# Altium PCB DAPLink-STM32F103CBT6.PcbDoc
Units mm, origin at the board's own origin, x right, y up, seen from the top; angles counter-clockwise.
Board outline 45.15 x 20.15 mm, 2 copper layers (Top Layer, Bottom Layer), stack 1.636 mm thick; 37 components, 31 nets, 151 pads, 31 vias.
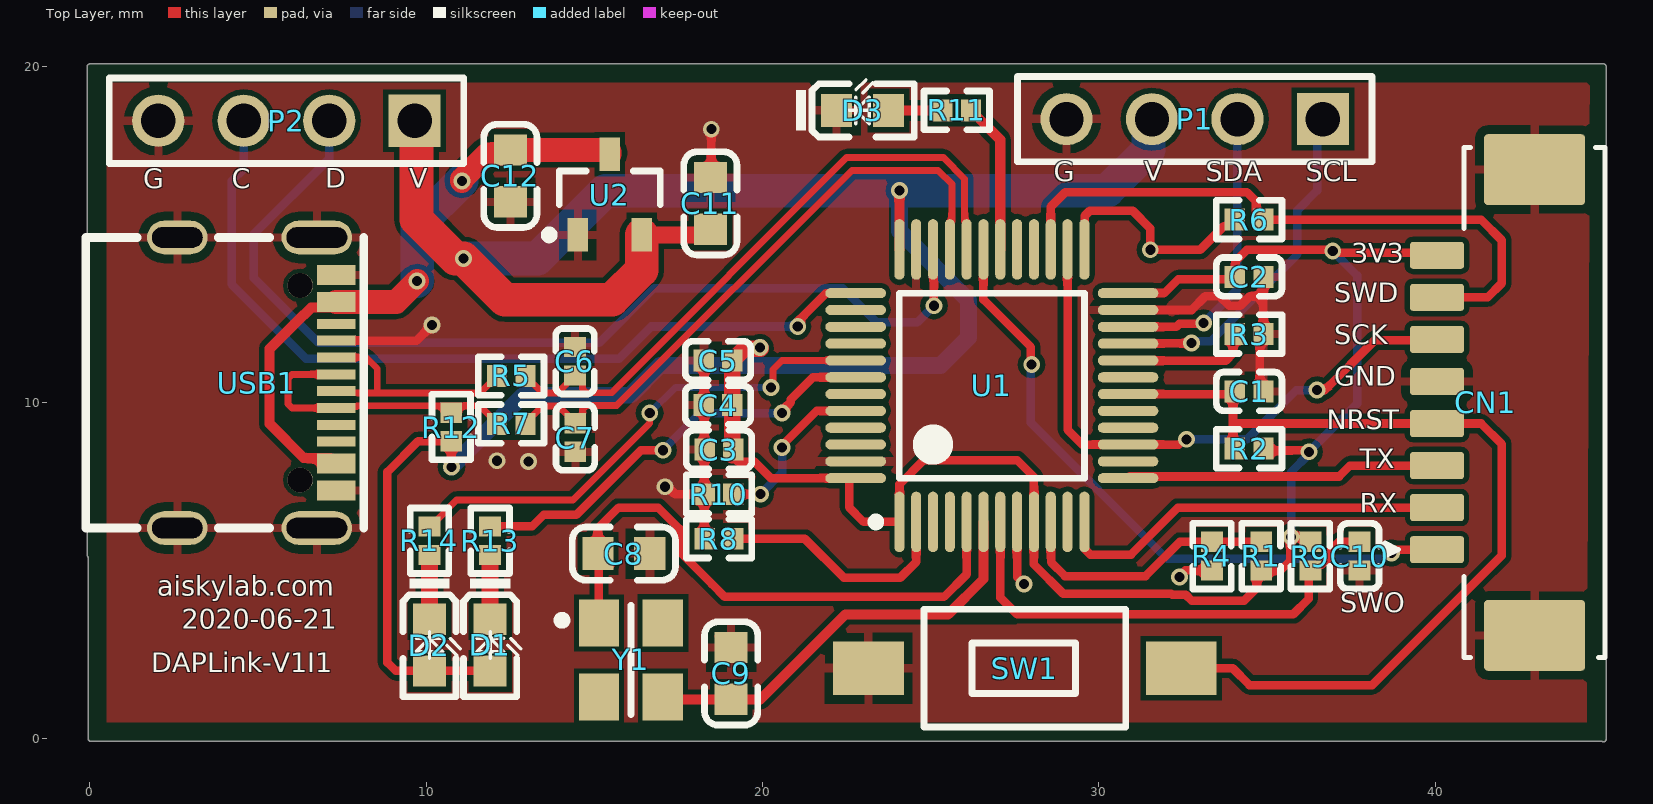
[diagram p0: Top Layer view]
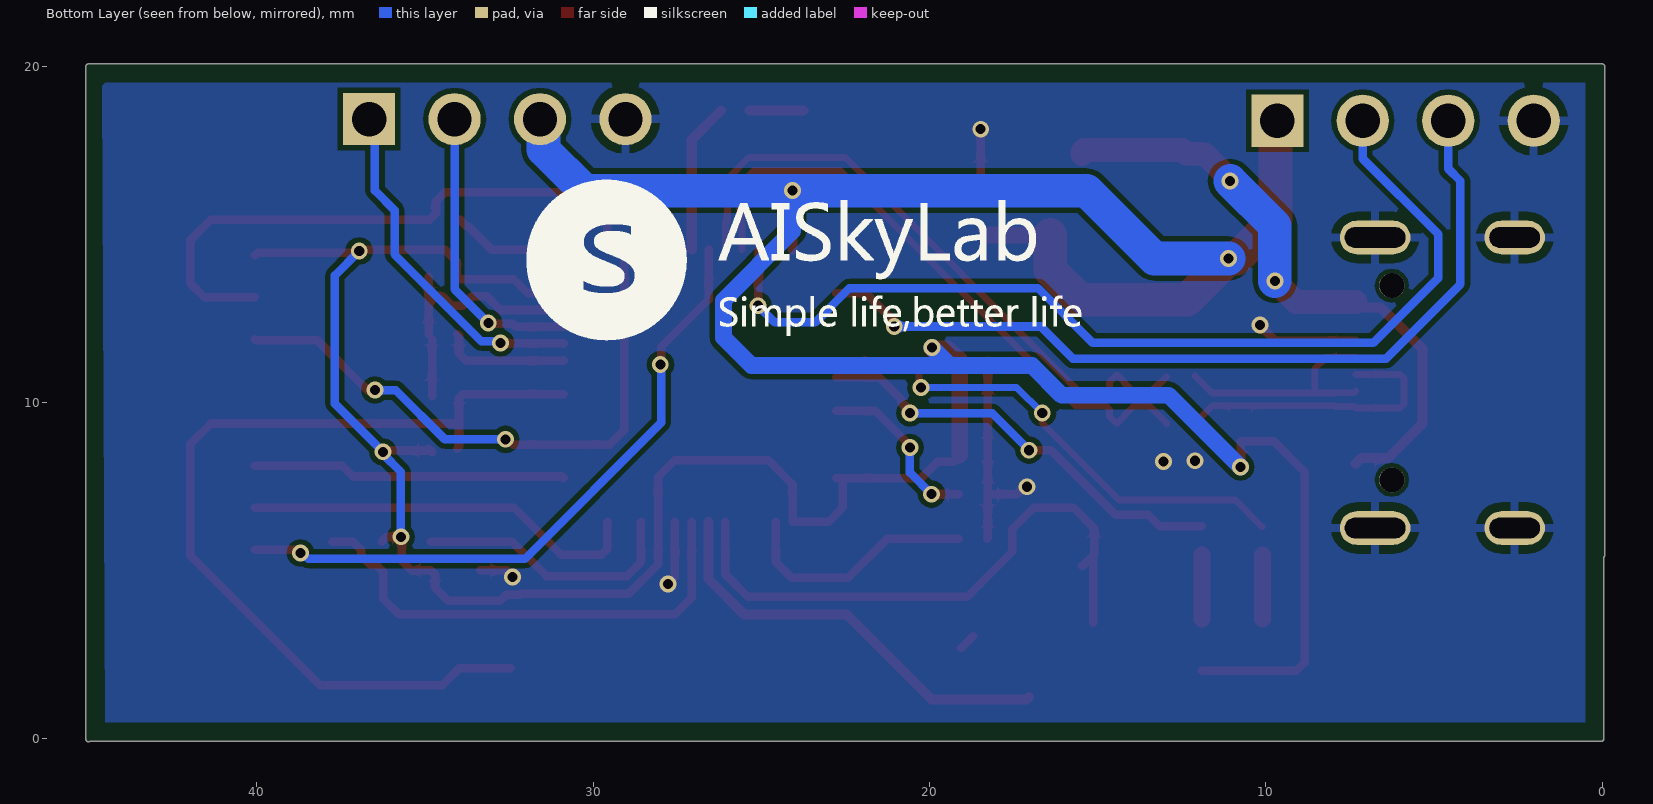
[diagram p1: Bottom Layer view, seen from below]

## Layer stack, top to bottom
Top Solder: solder mask 0.0127, Solder Resist, Dk 3.3
Top Layer: signal copper 0.0178
Dielectric1: core 1.6, FR-4, Dk 4.3
Bottom Layer: signal copper 0.0178
Bottom Solder: solder mask 0.0127, Solder Resist, Dk 3.3

## Board outline
-0.049,5.398 cw(c0,5.458) -0.077,5.458 -0.077,19.99 cw(c0,19.99) 0,20.066 45,20.066 cw(c45,19.99) 45.077,19.99 cw(c45,19.99) 45.077,19.99 cw(c45,19.989) 45.077,19.989 45.077,-0.011 cw(c45,-0.011) 44.961,-0.077 0.028,-0.077 cw(c0.028,0) -0.049,0

## Design rules (kind name [scope] priority, off if disabled: settings)
Clearance Clearance_2 [InComponent('USB1')] p1: gap=0.12 ignorepadtopadclearanceinfootprint=FALSE
Clearance Clearance_1 [InComponent('SW1')] p2: gap=0.152 ignorepadtopadclearanceinfootprint=FALSE except(0: Arc-SMDPad; 0.025: Arc-Arc)
Clearance [All] p3: gap=0.152 ignorepadtopadclearanceinfootprint=FALSE except(0.025: Arc-Arc)
DiffPairsRouting [All] p1: maxlimit=0.254 minlimit=0.178 mostfreqgap=0.178 toplayer_minwidth=0.203 toplayer_maxwidth=0.203 toplayer_prefwidth=0.203 bottomlayer_minwidth=0.203 bottomlayer_maxwidth=0.203 bottomlayer_prefwidth=0.203 maxuncoupledlength=12.7
HoleSize [All] p1: absolutevalues=TRUE maxlimit=7.62 minlimit=0.254 maxpercent=80.000 minpercent=20.000
HoleToHoleClearance [All] p1: gap=0 allowstackedmicrovias=TRUE
MinimumAnnularRing [All] p1: minimumring=0.1
MinimumSolderMaskSliver [All] p1 off: minsoldermaskwidth=0.254
PasteMaskExpansion [All] p1: expansion=0.254
PlaneClearance [All] p1: clearance=0.381
PlaneConnect [All] p1: pad.planeconnectstyle=Relief pad.reliefexpansion=0.508 pad.reliefentries=4 pad.reliefconductorwidth=0.254 pad.reliefairgap=0.254 via.planeconnectstyle=Direct via.reliefexpansion=0.508 via.reliefentries=4 via.reliefconductorwidth=0.254 via.reliefairgap=0.254
PolygonConnect [All] p1: thpad.connectstyle=Relief thpad.reliefconductorwidth=0.254 thpad.reliefentries=4 thpad.polygonreliefangle="90 Angle" thpad.airgapwidth=0.254 smdpad.connectstyle=Relief smdpad.reliefconductorwidth=0.254 smdpad.reliefentries=4 smdpad.polygonreliefangle="90 Angle" smdpad.airgapwidth=0.254 via.connectstyle=Direct via.reliefconductorwidth=0.254 via.reliefentries=4 via.polygonreliefangle="90 Angle" via.airgapwidth=0.254
RoutingVias [All] p1: holewidth=0.3 width=0.5 viastyle="Through Hole" minholewidth=0.3 minwidth=0.45 maxholewidth=0.3 maxwidth=1
SilkToSilkClearance [All] p1 off: silktosilkclearance=0.254
SilkToSolderMaskClearance SilkscreenOverComponentPads [IsPad] p1 off: minsilkscreentomaskgap=0.254 clearancetoexposedcopper=TRUE
SolderMaskExpansion [All] p1: expansion=0.254 istentingtop=FALSE
Width [All] p1: maxlimit=2.54 minlimit=0.1 preferedwidth=0.254
21 further rules are at their usual default settings.

## Classes and differential pairs
differential pair class USB2Diff: TGT_USB_D USB2D
differential pair USB2D: +USB2D_P -USB2D_N
differential pair TGT_USB_D: +TGT_USB_D_P -TGT_USB_D_N

## Components (designator, comment, footprint, x,y, rotation, side; value= is the part's Value field where it differs from the comment)
C1 "100nF (104) 10% 16V" 0402_C 34.463,10.33 r180 top
C2 "100nF (104) 10% 16V" 0402_C 34.463,13.736 r180 top
C3 "100nF (104) 10% 16V" 0402_C 18.702,8.597 r0 top
C4 "100nF (104) 10% 16V" 0402_C 18.675,9.921 r0 top
C5 "100nF (104) 10% 16V" 0402_C 18.675,11.245 r0 top
C6 "18pF (180) 5% 50V" 0402_C 14.422,11.227 r270 top
C7 "18pF (180) 5% 50V" 0402_C 14.432,8.959 r90 top
C8 "22pF" 0603_C 15.874,5.509 r180 top
C9 "22pF" 0603_C 19.065,1.944 r270 top
C10 "100nF (104) 10% 16V" 0402_C 37.749,5.433 r90 top
C11 "1uF (105) 10% 50V" 0603_C 18.448,15.92 r270 top
C12 "1uF (105) 10% 50V" 0603_C 12.501,16.737 r90 top
CN1 "gh1.25_8Pin" GH1.25_SMD_R_8Pin 41.5,10 r90 top
D1 "蓝灯 0603" 0603_LED_S1 11.899,2.788 r270 top
D2 "绿灯 0603" 0603_LED_S1 10.096,2.788 r270 top
D3 "红灯 0603" 0603_LED_S1 22.97,18.684 r0 top
P1 "61300411021" HDR-2.54-1x4-VB2B 36.656,18.424 r180 top
P2 "61300411021" HDR-2.54-1x4-VB2B 9.655,18.375 r180 top
R1 "4.7KΩ (4701) ±1%" 0402_R 34.822,5.433 r270 top
R2 "100KΩ (1003) ±1%" 0402_R 34.463,8.627 r0 top
R3 "10KΩ (1002) ±1%" 0402_R 34.463,12.033 r0 top
R4 "4.7KΩ (4701) ±1%" 0402_R 33.359,5.433 r90 top
R5 "33Ω (33R0) ±1%" 0402_R 12.524,10.789 r0 top
R6 "100Ω (1000) ±1%" 0402_R 34.463,15.438 r0 top
R7 "33Ω (33R0) ±1%" 0402_R 12.524,9.363 r0 top
R8 "10KΩ (1002) ±1%" 0402_R 18.702,5.95 r180 top
R9 "100KΩ (1003) ±1%" 0402_R 36.286,5.433 r90 top
R10 "100KΩ (1003) ±1%" 0402_R 18.702,7.274 r180 top
R11 "470Ω (4700) ±1%" 0402_R 25.77,18.684 r0 top
R12 "1.5KΩ (1501) ±1%" 0402_R 10.744,9.271 r90 top
R13 "470Ω (4700) ±1%" 0402_R 11.899,5.892 r270 top
R14 "470Ω (4700) ±1%" 0402_R 10.096,5.892 r270 top
SW1 "SW-PB" PB_TYCO_FSMSM 27.8,2.1 r180 top
U1 "STM32F103CBT6" STM32F103CBT6-FOOTPRINT-1 26.816,10.5 r90 top
U2 "XC6206P332MR" SOT95P245X110-3N 15.457,16.183 r90 top
USB1 "Type-C 16Pin" PCBComponent_1 4.2,10.6 r270 top
Y1 "8MHz" OSC_SI-TIME_SIT1602-2 16.085,2.349 r0 top

## Footprints (in the part's own frame and the unit in brackets; to place one, negate y for a bottom-side part, rotate by r counter-clockwise, add the part's x,y. Pads: shape width x height; smd on the part's side, far side on the other; paste and mask are expansions set on the pad)
0402_C [mm]
  rect 0.6x0.65 smd mask+0.051: 1(-0.425,0) 2(0.425,0)
  silkscreen extent -0.97,-0.58 0.97,0.58, body extent -0.48,-0.3 0.52,0.3, height 0.2
0402_R [mm]
  rect 0.6x0.65 smd mask+0.051: 1(-0.425,0) 2(0.425,0)
  silkscreen extent -0.97,-0.58 0.98,0.57, body extent -0.57,-0.27 0.58,0.28, height 0.41
0603_C [mm]
  rect 0.93x0.98 smd: 1(-0.77,0) 2(0.77,0)
  silkscreen extent -1.53,-0.79 1.54,0.79, body extent -0.8,-0.4 0.8,0.4, height 0.3
0603_LED_S1 [mm]
  rect 0.93x0.98 smd: A(0.77,0) K(-0.77,0)
  silkscreen extent -1.97,-0.79 1.54,0.92, body extent -0.8,-0.4 0.8,0.4, height 0.6
GH1.25_SMD_R_8Pin [mm]
  rrect20% 0.8x1.6 smd: 1(-4.375,1.45) 2(-3.125,1.45) 3(-1.875,1.45) 4(-0.625,1.45) 5(0.625,1.45) 6(1.875,1.45) 7(3.125,1.45) 8(4.375,1.45)
  rrect10% 2.1x3 smd: MP1(-6.925,-1.45) MP2(6.925,-1.45)
  silkscreen extent -7.58,-3.55 7.57,3, body extent -7.66,-3.6 7.66,1.74, height 3.53
HDR-2.54-1x4-VB2B [mm] ".025 SQ Post Terminal Strip Assembly, 1x4 Pins, Vertical, 2.54mm Pitch, Male"
  rect 1.55x1.55 hole 1.02: 1(0,0)
  round 1.55 hole 1.02: 2(2.54,0) 3(5.08,0) 4(7.62,0)
  silkscreen extent -1.46,-1.27 9.08,1.27, body extent -1.27,-1.27 8.89,1.27, height 8.38
OSC_SI-TIME_SIT1602-2 [mm] "SiT1602 Oscillators Series, Version 3.2mmx2.5mm, Pitch 2.1mm; 4 Pin"
  rect 1.2x1.4 smd: 1(-0.95,1.1) 2(-0.95,-1.1) 3(0.95,-1.1) 4(0.95,1.1)
  silkscreen extent -2.17,-1.62 0,1.63, body extent -1.55,-1.8 1.55,1.8, height 0.8
PB_TYCO_FSMSM [mm] "Body 3.5x6.0mm, Pushbutton Switch,  TYCO FSMSM Serie"
  rect 2.1x1.6 smd: 1(-4.65,0) 2(4.65,0)
  silkscreen extent -3,-1.75 3,1.75, body extent -5,-1.75 5,1.75, height 4.3
PCBComponent_1 [mm]
  oval 1x2.099 hole 0.61 slot 1.8 at 90 deg: 1(-4.307,2.55) 2(4.333,2.55)
  oval 1x1.799 hole 0.61 slot 1.5 at 90 deg: 3(-4.307,-1.6) 4(4.333,-1.6)
  rect 0.6x1.15 smd: A1B12(-3.187,3.125) A4B9(-2.387,3.125) B1A12(3.213,3.125) B4A9(2.413,3.125)
  rect 0.3x1.15 smd: A5(-1.237,3.125) A6(-0.237,3.125) A7(0.263,3.125) A8(-1.737,3.125) B5(1.763,3.125) B6(0.763,3.125) B7(-0.737,3.125) B8(1.263,3.125)
  round 0.75 hole 0.75 unplated: ""(-2.877,2.05) ""(2.903,2.05)
  silkscreen extent -4.3,-4.32 4.33,3.94, body extent -4.47,-4.28 4.47,3.3, height 3.26
SOT95P245X110-3N [mm] "SOT23, 3-Leads, Body 2.90x2.45mm, Pitch 0.95mm, IPC Medium Density"
  rect 1x0.6 smd: 1(-1.2,0.95) 2(-1.2,-0.95) 3(1.2,0)
  silkscreen extent -1.32,-1.5 0.7,1.92, body extent -1.3,-1.5 1.3,1.5, height 1.1
STM32F103CBT6-FOOTPRINT-1 [mm]
  oval 1.8x0.3 smd: 1(-4.05,2.75) 2(-4.05,2.25) 3(-4.05,1.75) 4(-4.05,1.25) 5(-4.05,0.75) 6(-4.05,0.25) 7(-4.05,-0.25) 8(-4.05,-0.75) 9(-4.05,-1.25) 10(-4.05,-1.75) 11(-4.05,-2.25) 12(-4.05,-2.75) 25(4.05,-2.75) 26(4.05,-2.25) 27(4.05,-1.75) 28(4.05,-1.25) 29(4.05,-0.75) 30(4.05,-0.25) 31(4.05,0.25) 32(4.05,0.75) 33(4.05,1.25) 34(4.05,1.75) 35(4.05,2.25) 36(4.05,2.75)
  oval 0.3x1.8 smd: 13(-2.75,-4.05) 14(-2.25,-4.05) 15(-1.75,-4.05) 16(-1.25,-4.05) 17(-0.75,-4.05) 18(-0.25,-4.05) 19(0.25,-4.05) 20(0.75,-4.05) 21(1.25,-4.05) 22(1.75,-4.05) 23(2.25,-4.05) 24(2.75,-4.05) 37(2.75,4.05) 38(2.25,4.05) 39(1.75,4.05) 40(1.25,4.05) 41(0.75,4.05) 42(0.25,4.05) 43(-0.25,4.05) 44(-0.75,4.05) 45(-1.25,4.05) 46(-1.75,4.05) 47(-2.25,4.05) 48(-2.75,4.05)
  silkscreen extent -4.17,-2.75 2.75,3.57, body extent -3.5,-3.5 3.5,3.5, height 1.6

## Part data
C1 C2 C3 C4 C5 C10: library part "0402 100nF (104) 10% 16V", "贴片电容", Package=0402, SuppliersPartNumber=C1525, ComponentLink1Description=供应商链接, ComponentLink1URL=http://www.szlcsc.com/product/details_1877.html, Supplier=LC
C6 C7: library part "0402 18pF (180) 5% 50V", "贴片电容", Package=0402, SuppliersPartNumber=C1549, ComponentLink1Description=供应商链接, ComponentLink1URL=http://www.szlcsc.com/product/details_1901.html, Supplier=LC
C8 C9: library part Cap, "Capacitor", LatestRevisionDate=17-Jul-2002, LatestRevisionNote="Re-released for DXP Platform.", PackageReference=RAD-0.3, Published=8-Jun-2000, Publisher="Altium Limited"
C11 C12: library part "0603 1uF (105) 10% 50V", "贴片电容", Package=0603, SuppliersPartNumber=C15849, ComponentLink1Description=供应商链接, ComponentLink1URL=http://www.szlcsc.com/product/details_16531.html, Supplier=LC
D1: library part "0603 蓝灯", "发光二极管", Package=0603, SuppliersPartNumber=C72041, ComponentLink1Description=供应商链接, ComponentLink1URL=http://www.szlcsc.com/product/details_73150.html, Supplier=LC
D2: library part "0603 绿灯", "发光二极管", Package=0603, SuppliersPartNumber=C72043, ComponentLink1Description=供应商链接, ComponentLink1URL=http://www.szlcsc.com/product/details_73152.html, Supplier=LC
D3: library part "0603 红灯", "发光二极管", Package=0603, SuppliersPartNumber=C2286, ComponentLink1Description=供应商链接, ComponentLink1URL=http://www.szlcsc.com/product/details_2659.html, Supplier=LC
P1 P2: library part HDR-1x4Pos, "THT Angled Pin Header WR-PHD, Pitch 2.54 mm, Single Row, 4 pins", Contact Resistance=20mOhm, Manufacturer="Wurth Elektronik", Operating Temperature=-40to105degC, Rated Current=3A, Withstanding Voltage=500VAC, Working Voltage=250VAC, Datasheet URL=https://katalog.we-online.de/em/datasheet/6130xx11021.pdf, Gender=Male, Manufacturer URL=http://www.we-online.de, Mounting Technology=THT, Orientation=Angled, Package Reference=61300411021, Packaging=Bag, Part Number=61300411021, Pin Number=4, Pitch=2.54mm, Publisher=WurthElektronik, Row Number=Single
R1 R4: library part "0402 4.7KΩ (4701) 1%", "贴片电阻", Package=0402, SuppliersPartNumber=C25900, ComponentLink1Description=供应商链接, ComponentLink1URL=http://www.szlcsc.com/product/details_26643.html, Supplier=LC
R2 R9 R10: library part "0402 100KΩ (1003) 1%", "贴片电阻", Package=0402, SuppliersPartNumber=C25741, ComponentLink1Description=供应商链接, ComponentLink1URL=http://www.szlcsc.com/product/details_26484.html, Supplier=LC
R3 R8: library part "0402 10KΩ (1002) 1%", "贴片电阻", Package=0402, SuppliersPartNumber=C25744, ComponentLink1Description=供应商链接, ComponentLink1URL=http://www.szlcsc.com/product/details_26487.html, Supplier=LC
R5 R7: library part "0402 33Ω (33R0) 1%", "贴片电阻", Package=0402, SuppliersPartNumber=C25105, ComponentLink1Description=供应商链接, ComponentLink1URL=http://www.szlcsc.com/product/details_25848.html, Supplier=LC
R6: library part "0402 100Ω (1000) 1%", "贴片电阻", Package=0402, SuppliersPartNumber=C25076, ComponentLink1Description=供应商链接, ComponentLink1URL=http://www.szlcsc.com/product/details_25819.html, Supplier=LC
R11 R13 R14: library part "0402 470Ω (4700) 1%", "贴片电阻", Package=0402, SuppliersPartNumber=C25117, ComponentLink1Description=供应商链接, ComponentLink1URL=http://www.szlcsc.com/product/details_25860.html, Supplier=LC
R12: library part "0402 1.5KΩ (1501) 1%", "贴片电阻", Package=0402, SuppliersPartNumber=C25867, ComponentLink1Description=供应商链接, ComponentLink1URL=http://www.szlcsc.com/product/details_26610.html, Supplier=LC
SW1: "Switch", LatestRevisionDate=17-Jul-2002, LatestRevisionNote="Re-released for DXP Platform.", PackageDescription="Switch; 2 Leads", PackageReference=SPST-2, Published=24-Mar-1999, Publisher="Altium Limited"
U1: library part CMP-020-00023-1, "ARM® 32-bit Cortex®-M3 CPU Core,72 MHz maximum frequency", Case/Package=LQFP48, Pins=48, RAM Size="64 or 128 Kbytes of Flash memory, 20 Kbytes of SRAM"
U2: library part CMP-019-00049-1, "低压差线性稳压(LDO),最大输入8V，输出电流100mA", Case/Package=SOT-23, Max Operating Temperature=80°C, Max Supply Voltage=8V, Min Operating Temperature=-25°C, Output Voltage=3.3V, Pins=3
USB1: library part TYPE-C16PIN, ComponentLink1Description=嘉立创, ComponentLink1URL=https://item.szlcsc.com/372551.html, Datasheet="javascript:fileModule.downloadFileNoRemark('https://atta.szlcsc.com/upload/public/pdf/source/20190521/C393939_7B9043D4CF1026AF443AB60D91FBCD5C.pdf%3FExpires%3D4070880000%26OSSAccessKeyId%3DLTAIJDIkh7KmGS1H%26Signature%3DcQcE%252FNX1dDNXtBUBosJ1RmuR16Q%253D%26response-content-disposition%3Dattachment%253Bfilename%253DC393939_TYPE-C%2525E6%2525AF%25258D%2525E5%2525BA%2525A716PIN%2525E5%2525BF%2525AB%2525E5%252585%252585%2525E9%252597%2525AA%2525E5%252585%252585USB3.0%2525E6%2525B2%252589%2525E6%25259D%2525BF%2525E6%2525AF%25258D%2525E5%2525BA%2525A7%2525E8%2525BF%25259E%2525E6%25258E%2525A5%2525E5%252599%2525A8_2019-05-21.PDF','60D38A6780882313296C67311B688FC3','new_pdf_doc_pdf','');buriedPoint({ty: 'click',op: 'download_pdf',data: 'C393939'});"
Y1: library part XTAL-4

## Via types
v1: diameter 0.5, hole 0.3, Top Layer to Bottom Layer, tented both sides, 31 vias

## Nets (pads, with @x,y where several pads share a name; then routed paths per layer and width w, separated by ;. In a path a pad name is that pad's centre, name@x,y a point inside that pad or via, vN(x,y) a via of type N, cw(c..) or ccw(c..) an arc to the next point about the centre after c; other vN are vias at no path point)
GND: C1.1 C2.1 C3.1 C4.1 C5.1 C6.1 C7.1 C8.1 C9.1 C10.1 C11.1 C12.1 CN1.5 CN1.MP1 CN1.MP2 D3.K P1.4 P2.4 R3.2 R4.1 R8.2 R10.2 SW1.2 U1.8 U1.23 U1.35 U1.47 U2.1 USB1.1 USB1.2 USB1.3 USB1.4 USB1.A1B12 USB1.A5 USB1.B1A12 | length 22.4
  Top Layer w0.254: USB1.A5 9.712,11.837 v1@10.124,12.25 ; v1@10.124,12.251 10.168,12.295 v1(10.168,12.3) ; v1(17.097,7.496) 17.176,7.496 17.398,7.274 R10.2@18.264,7.274 ; C5.1 18.264,11.231 R10.2@18.264,7.274 ; R8.2 18.264,5.964 R10.2@18.264,7.274 ; R10.2 R10.2@18.264,7.274 ; C11.1 18.475,16.717 v1(18.475,18.125) ; C9.1@18.702,3.052 19.04,2.714 C9.1 ; U1.8 27.566,4.813 v1(27.775,4.604) ; U1.23 32.751,12.75 33.162,13.161 33.593,13.161 33.877,12.877 34.199,12.877 34.483,13.161 34.888,13.161 ; v1(32.391,4.813) 32.391,4.838 32.561,5.008 R4.1 ; C1.1@34.782,10.19 R3.2@34.782,11.879 ; R3.2 34.888,13.161 ; C2.1 34.888,13.161
  other v1: 13.039,8.245 12.099,8.269
HSE_IN: C8.2 U1.5 Y1.1 | length 17.8
  Top Layer w0.254: Y1.1 C8.2@15.135,5.453 ; C8.2@15.467,5.146 15.442,5.146 C8.2@15.135,5.453 ; U1.5 26.066,4.895 25.392,4.22 18.876,4.22 18.493,4.604 17.53,5.566 17.53,6.24 16.895,6.875 15.72,6.875 15.104,6.26 C8.2 15.135,5.478 C8.2@15.135,5.453
HSE_OUT: C9.2 U1.6 Y1.3 | length 12.7
  Top Layer w0.3: Y1.3 17.11,1.174 19.935,1.174 22.463,3.703 25.517,3.703 26.566,4.752 U1.6
I2C2_SCL: P1.1 U1.21 | length 10.5
  Top Layer w0.254: U1.21 30.875,11.759 32.74,11.759 v1(32.751,11.771)
  Bottom Layer w0.254: v1(32.751,11.771) 32.799,11.818 33.316,11.818 33.861,12.363 35.9,14.402 35.9,15.716 36.484,16.3 36.484,18.252 P1.1
I2C2_SDA: P1.2 U1.22 | length 8.8
  Top Layer w0.254: U1.22 32.297,12.25 32.391,12.344 33.093,12.344 v1(33.113,12.363)
  Bottom Layer w0.254: v1(33.113,12.363) 34.116,13.366 P1.2
IF_SWCLK: P2.3 U1.37 | length 25.6
  Top Layer w0.254: v1(21.044,12.259) 21.044,12.409 21.876,13.241 22.758,13.241 U1.37
  Bottom Layer w0.254: P2.3@4.212,18.375 P2.3@4.212,18.574 ; P2.3 4.575,16.948 4.212,16.585 4.212,13.513 6.425,11.3 15.732,11.3 16.691,12.259 v1(21.044,12.259)
IF_SWDIO: P2.2 U1.34 | length 29.6
  Top Layer w0.254: U1.34 25.066,13.788 25.092,13.762 v1(25.092,12.877)
  Bottom Layer w0.254: P2.2 7.115,17.245 4.875,15.005 4.875,13.7 6.804,11.771 15.146,11.771 16.775,13.4 22.375,13.4 23.394,12.381 24.596,12.381 v1(25.092,12.877)
LED_COM_GRN: R14.1 U1.41 | length 15.2
  Top Layer w0.203: R14.1 10.121,6.317 10.904,7.1 14.362,7.1 16.644,9.382 v1(16.644,9.685) ; v1(20.248,10.448) 20.305,10.505 20.305,10.976 20.579,11.25 U1.41
  Bottom Layer w0.203: v1(16.644,9.685) 17.408,10.448 v1(20.248,10.448)
LED_DAP_BLUE: R13.1 U1.42 | length 12.8
  Top Layer w0.254: R13.1 13.145,6.317 13.488,6.659 14.46,6.659 16.381,8.581 v1(17.035,8.581) ; v1(20.579,9.685) 20.579,9.751 20.838,10.01 20.838,10.091 21.497,10.75 U1.42
  Bottom Layer w0.254: v1(17.035,8.581) 17.035,8.585 18.135,9.685 v1(20.579,9.685)
LED_PWR_RED: R11.2 U1.30 | length 4.5
  Top Layer w0.3: R11.2 27.066,17.812 U1.30
NetC10_2: C10.2 R9.1 U1.7 | length 14.6
  Top Layer w0.254: U1.7 27.066,4.203 27.566,3.703 35.775,3.703 36.232,4.159 36.232,4.954 R9.1 36.459,5.181 36.629,5.181 36.89,5.442 36.89,5.612 37.136,5.858 C10.2
NetD1_K: D1.K R13.2 | length 1.9
  Top Layer w0.5: D1.K R13.2
NetD2_K: D2.K R14.2 | length 1.9
  Top Layer w0.5: D2.K R14.2
NetD3_A: D3.A R11.1 | length 1.6
  Top Layer w0.3: D3.A R11.1
NetR1_1: R1.1 R4.2 U1.10 | length 8
  Top Layer w0.254: U1.10 28.575,6.441 28.575,5.252 28.989,4.837 31.387,4.837 32.408,5.858 R1.1
NetR3_1: R3.1 U1.20 | length 3.8
  Top Layer w0.254: U1.20 30.875,11.241 33.768,11.241 33.985,11.458 33.985,11.98 R3.1
NetR6_1: R6.1 U1.25 | length 6.7
  Top Layer w0.254: U1.25 29.575,14.559 29.575,15.551 29.724,15.7 31.002,15.7 31.526,15.176 v1(31.526,14.541) 33.009,14.541 33.709,15.24 33.759,15.24 33.932,15.413 R6.1@33.932,15.438
NetR8_1: R8.1 U1.2 | length 7.3
  Top Layer w0.254: R8.1 21.255,5.95 22.417,4.788 24.094,4.788 24.566,5.26 U1.2
NetR10_1: R10.1 U1.44 | length 5.1
  Top Layer w0.254: R10.1 v1(19.935,7.274) ; v1(20.579,8.659) 20.579,8.723 21.607,9.75 U1.44
  Bottom Layer w0.254: v1(19.935,7.274) 20.579,7.918 v1(20.579,8.659)
TGT_NRESET: C1.2 CN1.4 R2.1 SW1.1 U1.18 | length 27.4
  Top Layer w0.254: U1.18 33.872,10.25 33.985,10.137 33.985,9.543 33.985,8.68 R2.1 ; SW1.1 33.975,2.1 34.475,1.6 38.124,1.6 38.745,2.221 41.975,5.451 41.975,8.762 41.362,9.375 CN1.4 34.153,9.375
TGT_RX: CN1.2 U1.12 | length 11.9
  Top Layer w0.254: U1.12 29.575,6.441 29.575,5.641 29.738,5.478 30.953,5.478 32.35,6.875 CN1.2
TGT_SWCLK: CN1.6 U1.15 U1.26 | length 17.8
  Top Layer w0.254: U1.26 29.066,9.188 29.504,8.75 U1.15 32.377,8.75 32.532,8.906 v1(32.599,8.906) ; v1(36.484,10.368) 36.718,10.368 38.2,11.85 40.025,11.85 CN1.6
  Bottom Layer w0.254: v1(32.599,8.906) 34.406,8.906 35.868,10.368 v1(36.484,10.368)
TGT_SWDIO: CN1.7 R6.2 U1.27 | length 19
  Top Layer w0.254: U1.27 28.566,15.821 28.995,16.25 34.399,16.25 34.668,15.981 34.668,15.627 34.857,15.438 41.362,15.438 41.975,14.825 41.975,13.545 41.555,13.125 CN1.7
TGT_SWO: CN1.1 U1.31 | length 19.6
  Top Layer w0.254: U1.31 26.566,13.058 27.975,11.649 27.975,11.15 v1(28,11.125) ; v1(38.7,5.525) 38.767,5.525 38.867,5.625 CN1.1
  Bottom Layer w0.254: v1(28,11.125) 27.975,11.1 27.975,9.4 32.025,5.35 38.458,5.35 38.633,5.525 v1(38.7,5.525)
TGT_TX: CN1.3 U1.13 | length 9.3
  Top Layer w0.254: U1.13 30.916,7.8 37.136,7.8 37.461,8.125 CN1.3
TGT_USB_D_N: R5.1 USB1.A7 USB1.B7 | length 7.1
  Top Layer w0.203: USB1.A7 7.373,10.289 7.95,10.289 7.953,10.285 8.544,10.285 ; USB1.B7 8.212,11.337 8.544,11.005 8.544,10.285 ; R5.1 11.595,10.285 8.544,10.285
TGT_USB_D_P: R7.1 R12.2 USB1.A6 USB1.B6 | length 8.8
  Top Layer w0.203: USB1.A6 6.012,10.837 5.893,10.718 5.893,9.956 6.012,9.837 USB1.B6 7.373,9.885 7.935,9.885 7.953,9.904 11.583,9.904 12.099,9.388 R7.1
USB2D_N: C6.2 R5.2 U1.32 | length 19.1
  Top Layer w0.203: R5.2@12.949,10.764 13.148,10.566 13.173,10.566 13.457,10.282 13.902,10.282 14.199,10.579 14.199,10.604 14.397,10.802 14.447,10.802 14.646,10.604 14.646,10.407 14.765,10.288 15.504,10.288 22.495,17.279 25.377,17.279 26.007,16.649 26.007,15.386 26.066,15.326 U1.32
USB2D_P: C7.2 R7.2 U1.33 | length 18.5
  Top Layer w0.203: R7.2 12.949,9.388 13.463,9.901 13.915,9.901 14.208,9.607 14.208,9.582 14.407,9.384 14.447,9.384 14.646,9.582 14.646,9.788 14.765,9.907 15.662,9.907 22.653,16.898 25.219,16.898 25.626,16.492 25.626,15.386 25.566,15.326 U1.33
VBus: C12.2 U2.3 USB1.A4B9 USB1.B4A9 | length 18.4
  Top Layer w0.254: 6.34,12.593 6.354,12.593 ; USB1.A4B9@7.16,12.822 USB1.A4B9 ; C12.2@12.377,17.383 C12.2
  Top Layer w0.305: 6.34,12.593 5.343,11.596 5.343,9.363 6.354,8.351 7.16,8.351 USB1.B4A9 ; 6.354,12.593 6.584,12.822 USB1.A4B9@7.16,12.822
  Top Layer w0.7: USB1.A4B9 9.104,12.987 v1(9.729,13.612) ; v1(11.06,16.585) 11.06,16.636 11.807,17.383 11.951,17.383 11.96,17.392 C12.2@12.377,17.392 ; C12.2 15.407,17.507 15.457,17.457 U2.3
  Bottom Layer w1: v1(9.729,13.612) 9.729,15.254 v1(11.06,16.585)
VCC3V3: C2.2 C3.2 C4.2 C5.2 C11.2 CN1.8 D1.A D2.A P1.3 P2.1 R1.2 R2.2 R9.2 R12.1 U1.1 U1.9 U1.24 U1.36 U1.48 U2.2 | length 124.1
  Top Layer w0.254: v1(10.754,8.085) 10.744,8.095 R12.1 9.756,8.846 8.845,7.935 8.845,2.271 9.097,2.018 D1.A ; C11.2@18.281,14.983 C11.2 ; C3.2@19.1,8.435 19.1,8.41 19.273,8.237 19.762,8.237 20.248,7.75 U1.48@22.591,7.75 ; U1.48 U1.48@22.591,7.75 ; U1.24 30.875,13.259 31.95,13.259 32.35,13.659 33.932,13.659 34.052,13.78 34.052,14.194 34.399,14.541 36.909,14.541 v1(36.95,14.5) 36.997,14.453 39.972,14.453 CN1.8 ; R2.2@34.782,8.521 R2.2 ; 35.728,8.568 34.947,8.568 R2.2 ; v1(36.246,8.534) 36.199,8.581 34.934,8.581 R2.2 ; R9.2 36.136,6.007 v1(35.711,6.007) 35.681,5.978 35.681,5.292 35.397,5.008 R1.2 34.692,4.878 34.692,4.482 34.32,4.109 32.751,4.109 32.577,4.283 32.172,4.283 32.141,4.314 28.938,4.314 28.066,5.186 U1.9 28.066,7.788 27.566,8.288 24.793,8.288 24.066,7.562 U1.1 23.004,6.45 22.57,6.884 22.57,7.729 U1.48@22.591,7.75
  Top Layer w0.3: U1.36 v1(24.066,16.3)
  Top Layer w0.5: U2.2 C11.2@18.281,14.983 ; C3.2@19.1,8.435 19.1,11.27 19.15,11.32 19.175,11.32 19.451,11.596 19.935,11.596 19.935,11.617 v1(19.92,11.632)
  Top Layer w1: P2.1 9.712,18.318 9.712,15.438 10.869,14.281 v1(11.109,14.281) 12.333,13.058 15.527,13.058 16.407,13.937 U2.2
  Bottom Layer w0.254: v1(35.711,6.007) 35.711,7.936 36.25,8.475 36.25,8.53 v1(36.246,8.534) 37.675,9.964 37.675,13.775 v1(36.95,14.5)
  Bottom Layer w0.5: v1(10.754,8.085) 12.883,10.214 16.065,10.214 16.951,11.1 19.388,11.1 ; v1(19.92,11.632) 19.388,11.1 ; v1(24.066,16.3) 24.066,15.094 26.125,13.036 26.125,11.936 25.29,11.1 19.388,11.1
  Bottom Layer w1: v1(11.109,14.281) 13.306,14.281 15.325,16.3 v1(24.066,16.3) 30.256,16.3 31.471,17.515 31.471,18.319 P1.3
pads on no net: U1.3 U1.4 U1.11 U1.14 U1.16 U1.17 U1.19 U1.28 U1.29 U1.38 U1.39 U1.40 U1.43 U1.45 U1.46 USB1. USB1.A8 USB1.B5 USB1.B8 Y1.2 Y1.4

## Polygon pours and split planes (outlines as drawn)
GND on Bottom Layer "GND_L02_P000" (solid, remove dead copper, pour order 0): 0.5,0.5 44.5,0.5 44.587,19.5 0.5,19.5
GND on Top Layer "GND_L01_P001" (solid, remove dead copper, pour order 1): 0.5,0.5 44.5,0.5 44.587,19.5 0.5,19.5

## Other copper
Top Layer:
  pour cut-out: 25.517,3.394 27.543,3.394 27.566,3.418 26.86,4.124 26.86,4.738 25.517,3.394

## Silkscreen, mask and mechanical layers (free items; w line width, h text height)
Top Overlay:
  text "G" at 28.65,16.384 h1
  text "V" at 31.35,16.395 h1
  text "SDA" at 33.175,16.384 h1
  text "SCL" at 36.15,16.384 h1
  text "G" at 1.582,16.175 h1
  text "C" at 4.212,16.175 h1
  text "D" at 7,16.187 h1
  text "V" at 9.496,16.187 h1
  text "3V3" at 37.495,13.966 h1
  text "SWD" at 36.997,12.791 h1
  text "SCK" at 36.997,11.536 h1
  text "GND" at 37,10.311 h1
  text "NRST" at 36.775,9.011 h1
  text "TX" at 37.749,7.849 h1
  text "RX" at 37.749,6.525 h1
  text "aiskylab.com" at 2.003,4.066 h1
  text "SWO" at 37.174,3.57 h1
  text "2020-06-21" at 2.727,3.079 h1
  text "DAPLink-V1I1" at 1.82,1.791 h1
Bottom Overlay:
  drawing of 5761 lines, arcs and shapes, not listed
Board:
  lines w0.152: 0,5.458 0,14.558 ; 0,14.55 0,19.99 45,19.99 45,-0.011 ; 0.028,5.45 0.028,0 45,0 ; 43.112,19.99 43.123,19.979

## Dimensions
0.028,0 to 0,19.99 on Dimensions
0.028,0 to 45,0 on Dimensions